# EAGLE board SparkFun_Music_Instrument_Shield_Panel_v13 (EAGLE 7.4.0), part 1 of 2
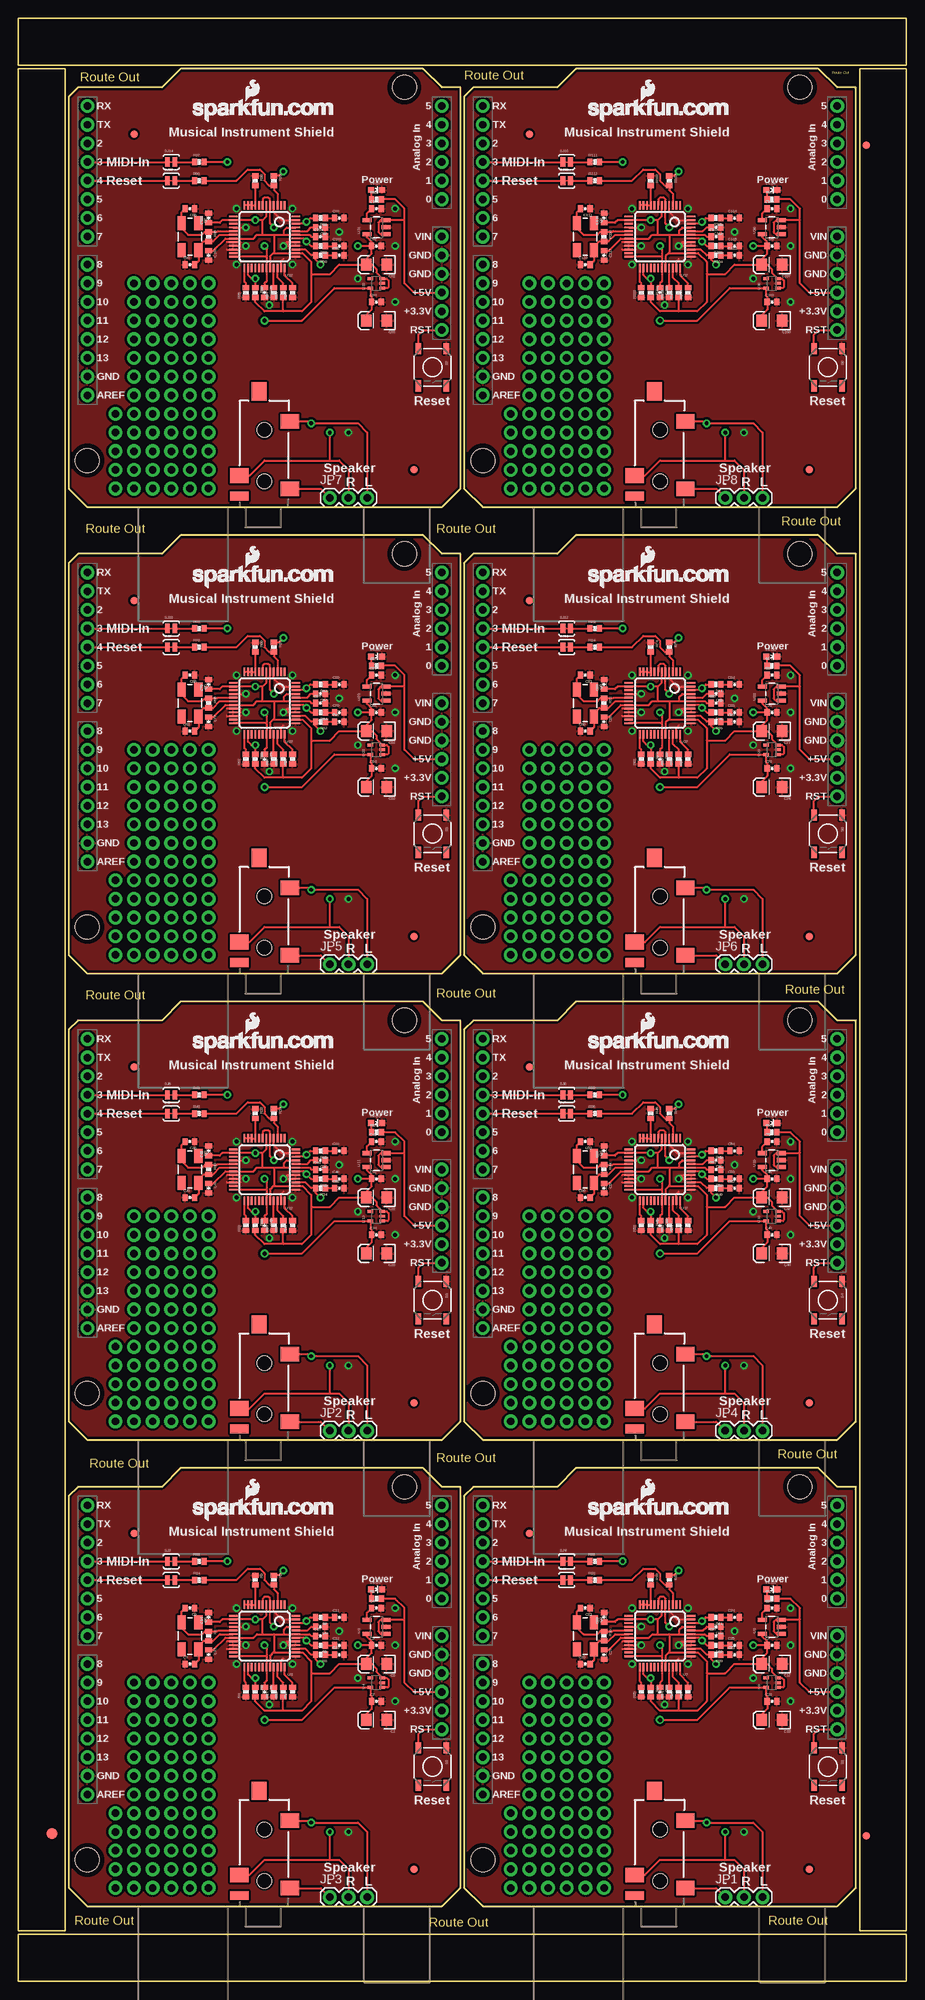
[diagram p0: board, top side]
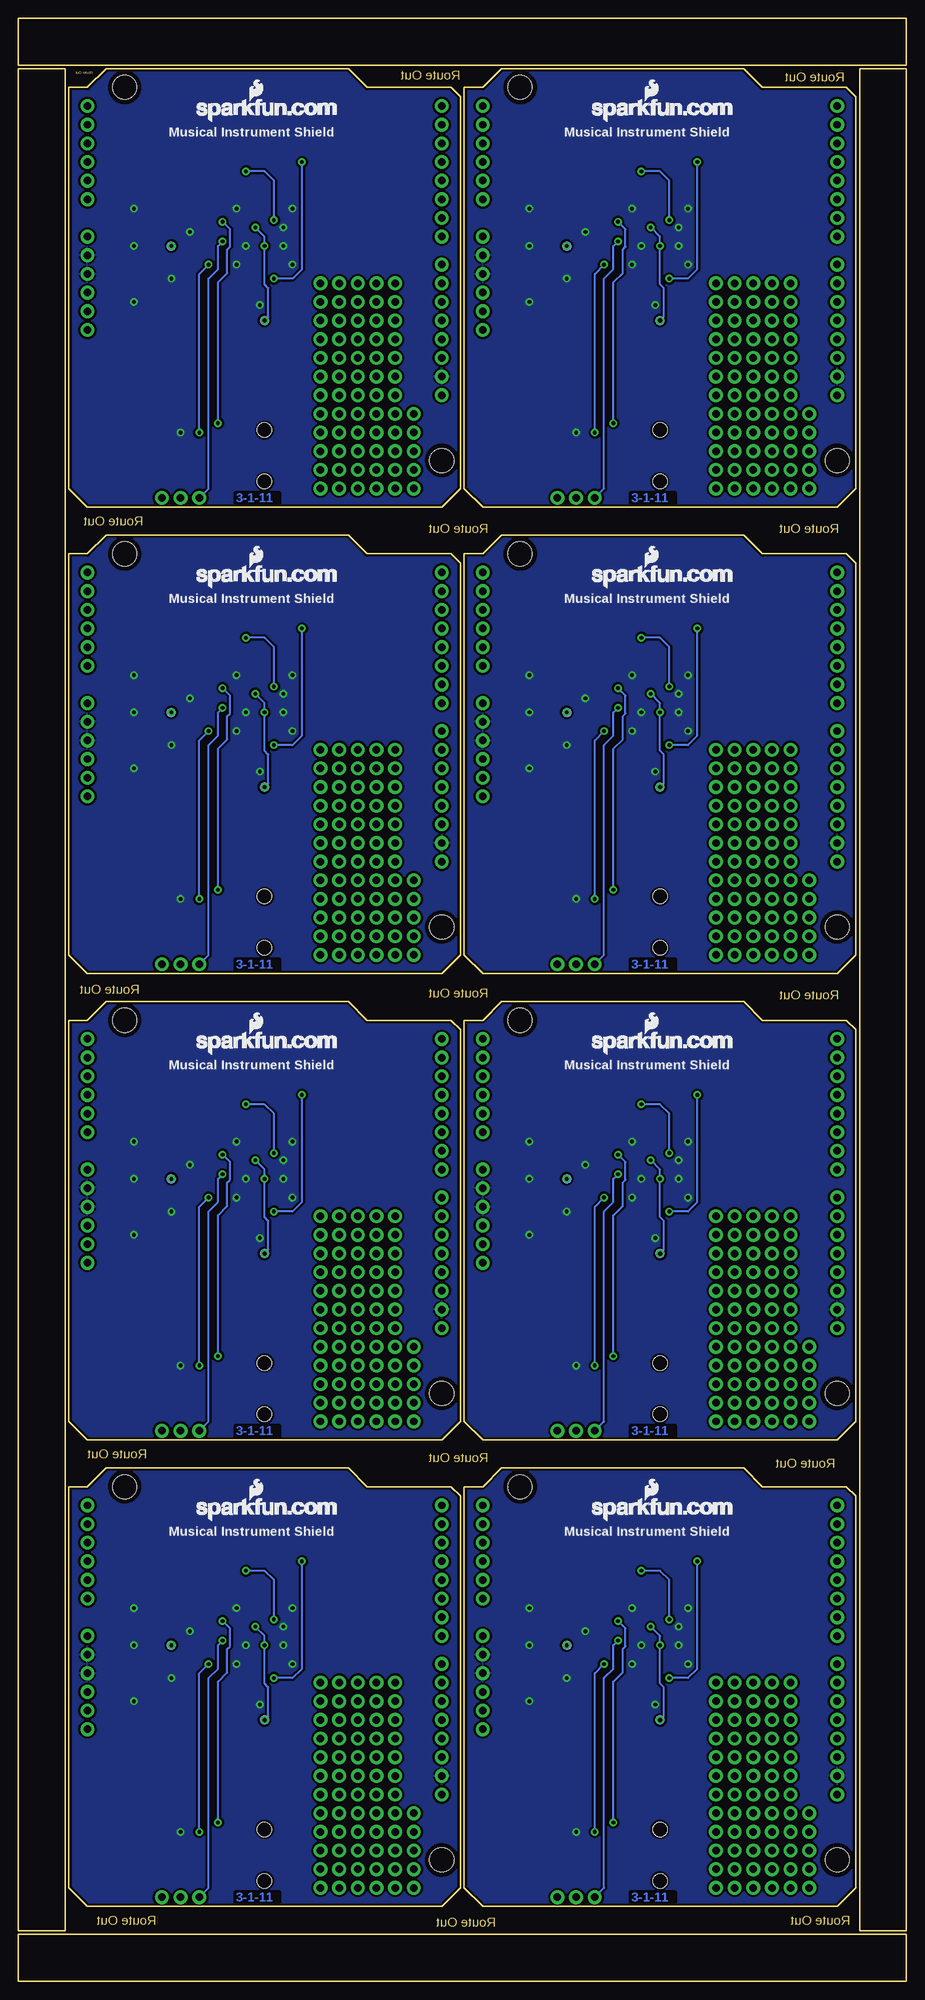
[diagram p1: board, bottom side, seen from below]

Size 120.9 x 267.21 mm. Coordinates in mm from the lower left corner, seen from the top.
Outline: 6.35,82.55 6.35,6.86 0,6.86 0,33.02
Outline: 0,30.48 0,260.35 6.35,260.35 6.35,80.01
Outline: 79.25,0 0,0 0,6.35 29.72,6.35
Outline: 27.18,6.35 120.9,6.35 120.9,0 76.71,0
Outline: 120.9,82.55 120.9,6.86 114.55,6.86 114.55,33.02
Outline: 114.55,30.48 114.55,260.35 120.9,260.35 120.9,80.01
Outline: 41.66,267.21 120.9,267.21 120.9,260.86 91.19,260.86
Outline: 93.73,260.86 0,260.86 0,267.21 44.2,267.21
Outline: 6.86,66.04 8.13,67.31 19.56,67.31 22.1,69.85 55.12,69.85 57.66,67.31 60.2,67.31 60.2,12.7 57.66,10.16 9.4,10.16 6.86,12.7 6.86,66.04
Outline: 60.71,66.04 61.98,67.31 73.41,67.31 75.95,69.85 108.97,69.85 111.51,67.31 114.05,67.31 114.05,12.7 111.51,10.16 63.25,10.16 60.71,12.7 60.71,66.04
Outline: 6.86,129.54 8.13,130.81 19.56,130.81 22.1,133.35 55.12,133.35 57.66,130.81 60.2,130.81 60.2,76.2 57.66,73.66 9.4,73.66 6.86,76.2 6.86,129.54
Outline: 60.71,129.54 61.98,130.81 73.41,130.81 75.95,133.35 108.97,133.35 111.51,130.81 114.05,130.81 114.05,76.2 111.51,73.66 63.25,73.66 60.71,76.2 60.71,129.54
Outline: 6.86,193.04 8.13,194.31 19.56,194.31 22.1,196.85 55.12,196.85 57.66,194.31 60.2,194.31 60.2,139.7 57.66,137.16 9.4,137.16 6.86,139.7 6.86,193.04
Outline: 60.71,193.04 61.98,194.31 73.41,194.31 75.95,196.85 108.97,196.85 111.51,194.31 114.05,194.31 114.05,139.7 111.51,137.16 63.25,137.16 60.71,139.7 60.71,193.04
Outline: 6.86,256.54 8.13,257.81 19.56,257.81 22.1,260.35 55.12,260.35 57.66,257.81 60.2,257.81 60.2,203.2 57.66,200.66 9.4,200.66 6.86,203.2 6.86,256.54
Outline: 60.71,256.54 61.98,257.81 73.41,257.81 75.95,260.35 108.97,260.35 111.51,257.81 114.05,257.81 114.05,203.2 111.51,200.66 63.25,200.66 60.71,203.2 60.71,256.54
Copper layers (1*16): Top 0.035mm / dielectric 1.5mm / Bottom 0.035mm
Design rules "SparkFun *": minimum track width 8mil, minimum drill 20mil, track to track 8mil, track to pad 8mil, pad to pad 8mil, via to via 8mil, smd to smd 8mil, copper to edge 9mil, drill to drill 7mil, minimum pad ring 12mil, minimum via ring 10mil, stop-mask expansion 4mil, vias tented up to drill 20mil, thermal gap 10mil

## Footprints (pad centres in the part's own frame; a part is rotated, then mirrored left to right if it is on the bottom)
EIA3216 = smd 1.4 x 1.6: A 1.4,0; C -1.4,0
0402-CAP = smd 0.7 x 0.9: 1 -0.65,0; 2 0.65,0
FIDUCIAL-1.5X3 = smd 1.5 x 1.5: 1 0,0
FIDUCIAL-1X2 = smd 1 x 1: 1 0,0
1X03 = drill 1.016 pad 1.88: 1 0,0; 2 2.54,0; 3 5.08,0
LED-0603 = smd 0.8 x 0.8: A 0,-0.75; C 0,0.75
CRYSTAL-SMD-5X3 = smd 1.9 x 1.1: 1 -1.85,-1.15; 2 1.85,-1.15; 3 1.85,1.15; 4 -1.85,1.15
0402-RES = smd 0.7 x 0.9: 1 -0.65,0; 2 0.65,0
TACTILE_SWITCH_SMD = smd 1.524 x 0.762: 1 -2.54,1.905; 2 2.54,1.905; 3 -2.54,-1.905; 4 2.54,-1.905
SJ_2S-TRACE = smd 0.635 x 1.27: 1 -0.508,0; 2 0.508,0
PAD.03X.05 = smd 1.27 x 1.27: P$1 0,0
SOT23-5 = smd 0.55 x 1.2: 1 -0.95,-1.3; 2 0,-1.3; 3 0.95,-1.3; 4 0.95,1.3; 5 -0.95,1.3
DUEMILANOVE_SHIELD = drill 1.016 pad 1.88: 3.3V 50.8,26.67; 5V 50.8,29.21; A0 50.8,41.91; A1 50.8,44.45; A2 50.8,46.99; A3 50.8,49.53; A4 50.8,52.07; A5 50.8,54.61; AREF 2.54,15.24; D2 2.54,49.53; D3 2.54,46.99; D4 2.54,44.45; D5 2.54,41.91; D6 2.54,39.37; D7 2.54,36.83; D8 2.54,33.02; D9 2.54,30.48; D10 2.54,27.94; D11 2.54,25.4; D12 2.54,22.86; D13 2.54,20.32; GND@0 50.8,31.75; GND@1 50.8,34.29; GND@2 2.54,17.78; RES 50.8,24.13; RX 2.54,54.61; TX 2.54,52.07; VIN 50.8,36.83 | hole 3.302: 45.72,57.15; 2.54,6.35
LQFP-48 = smd 0.254 x 1.143: 1 -2.75,-4.25; 2 -2.25,-4.25; 3 -1.75,-4.25; 4 -1.25,-4.25; 5 -0.75,-4.25; 6 -0.25,-4.25; 7 0.25,-4.25; 8 0.75,-4.25; 9 1.25,-4.25; 10 1.75,-4.25; 11 2.25,-4.25; 12 2.75,-4.25; 25 2.75,4.25; 26 2.25,4.25; 27 1.75,4.25; 28 1.25,4.25; 29 0.75,4.25; 30 0.25,4.25; 31 -0.25,4.25; 32 -0.75,4.25; 33 -1.25,4.25; 34 -1.75,4.25; 35 -2.25,4.25; 36 -2.75,4.25 | smd 1.143 x 0.254: 13 4.25,-2.75; 14 4.25,-2.25; 15 4.25,-1.75; 16 4.25,-1.25; 17 4.25,-0.75; 18 4.25,-0.25; 19 4.25,0.25; 20 4.25,0.75; 21 4.25,1.25; 22 4.25,1.75; 23 4.25,2.25; 24 4.25,2.75; 37 -4.25,2.75; 38 -4.25,2.25; 39 -4.25,1.75; 40 -4.25,1.25; 41 -4.25,0.75; 42 -4.25,0.25; 43 -4.25,-0.25; 44 -4.25,-0.75; 45 -4.25,-1.25; 46 -4.25,-1.75; 47 -4.25,-2.25; 48 -4.25,-2.75
SC70 = smd 0.4 x 0.75: 1 -0.65,-0.825; 2 0,-0.825; 3 0.65,-0.825; 4 0.65,0.825; 5 -0.65,0.825
AUDIO-JACK-3.5MM-SMD = smd 2 x 2.5: RING 4.3,3.45; SLEEVE 2.5,-3.45; TIP 11.7,-3.45 | smd 1.2 x 2.5: RSH 1.5,3.45 | smd 2.5 x 2: TSH 15.75,0.75 | hole 2: 3.5,0; 10.5,0

## Placement (x,y rotation side)
C1  10uF  [EIA3216]  48.77,35.56 180 top
C2  0.1uF  [0402-CAP]  48.77,38.1 0 top
C3  22pF  [0402-CAP]  23.37,43.18 0 top
C4  470pF  [0402-CAP]  48.77,50.8 0 top
C5  0.1uF  [0402-CAP]  48.77,45.72 0 top
C6  10uF  [EIA3216]  48.77,43.18 180 top
C7  0.1uF  [0402-CAP]  102.62,45.72 0 top
C8  22pF  [0402-CAP]  23.37,50.8 180 top
C9  1.0uF  [0402-CAP]  41.15,48.26 180 top
C10  10nF  [0402-CAP]  43.69,44.45 0 top
C11  10nF  [0402-CAP]  43.69,49.53 0 top
C12  47nF  [0402-CAP]  43.69,45.72 0 top
C13  0.1uF  [0402-CAP]  25.91,44.45 270 top
C14  0.1uF  [0402-CAP]  25.91,49.53 90 top
C15  0.1uF  [0402-CAP]  41.15,46.99 0 top
C16  0.1uF  [0402-CAP]  33.53,39.37 270 top
C17  10uF  [EIA3216]  102.62,43.18 180 top
C18  10uF  [EIA3216]  102.62,35.56 180 top
C19  0.1uF  [0402-CAP]  102.62,38.1 0 top
C20  22pF  [0402-CAP]  77.22,43.18 0 top
C21  22pF  [0402-CAP]  77.22,50.8 180 top
C22  1.0uF  [0402-CAP]  95,48.26 180 top
C23  10nF  [0402-CAP]  97.54,44.45 0 top
C24  10nF  [0402-CAP]  97.54,49.53 0 top
C25  47nF  [0402-CAP]  97.54,45.72 0 top
C26  470pF  [0402-CAP]  102.62,50.8 0 top
C27  0.1uF  [0402-CAP]  79.76,44.45 270 top
C28  0.1uF  [0402-CAP]  79.76,49.53 90 top
C29  0.1uF  [0402-CAP]  95,46.99 0 top
C30  0.1uF  [0402-CAP]  87.38,39.37 270 top
C31  0.1uF  [0402-CAP]  48.77,109.22 0 top
C32  10uF  [EIA3216]  48.77,106.68 180 top
C33  10uF  [EIA3216]  48.77,99.06 180 top
C34  0.1uF  [0402-CAP]  48.77,101.6 0 top
C35  22pF  [0402-CAP]  23.37,106.68 0 top
C36  22pF  [0402-CAP]  23.37,114.3 180 top
C37  1.0uF  [0402-CAP]  41.15,111.76 180 top
C38  10nF  [0402-CAP]  43.69,107.95 0 top
C39  10nF  [0402-CAP]  43.69,113.03 0 top
C40  47nF  [0402-CAP]  43.69,109.22 0 top
C41  470pF  [0402-CAP]  48.77,114.3 0 top
C42  0.1uF  [0402-CAP]  25.91,107.95 270 top
C43  0.1uF  [0402-CAP]  25.91,113.03 90 top
C44  0.1uF  [0402-CAP]  41.15,110.49 0 top
C45  0.1uF  [0402-CAP]  33.53,102.87 270 top
C46  0.1uF  [0402-CAP]  102.62,109.22 0 top
C47  10uF  [EIA3216]  102.62,106.68 180 top
C48  10uF  [EIA3216]  102.62,99.06 180 top
C49  0.1uF  [0402-CAP]  102.62,101.6 0 top
C50  22pF  [0402-CAP]  77.22,106.68 0 top
C51  22pF  [0402-CAP]  77.22,114.3 180 top
C52  1.0uF  [0402-CAP]  95,111.76 180 top
C53  10nF  [0402-CAP]  97.54,107.95 0 top
C54  10nF  [0402-CAP]  97.54,113.03 0 top
C55  47nF  [0402-CAP]  97.54,109.22 0 top
C56  470pF  [0402-CAP]  102.62,114.3 0 top
C57  0.1uF  [0402-CAP]  79.76,107.95 270 top
C58  0.1uF  [0402-CAP]  79.76,113.03 90 top
C59  0.1uF  [0402-CAP]  95,110.49 0 top
C60  0.1uF  [0402-CAP]  87.38,102.87 270 top
C61  0.1uF  [0402-CAP]  48.77,172.72 0 top
C62  10uF  [EIA3216]  48.77,170.18 180 top
C63  10uF  [EIA3216]  48.77,162.56 180 top
C64  0.1uF  [0402-CAP]  48.77,165.1 0 top
C65  22pF  [0402-CAP]  23.37,170.18 0 top
C66  22pF  [0402-CAP]  23.37,177.8 180 top
C67  1.0uF  [0402-CAP]  41.15,175.26 180 top
C68  10nF  [0402-CAP]  43.69,171.45 0 top
C69  10nF  [0402-CAP]  43.69,176.53 0 top
C70  47nF  [0402-CAP]  43.69,172.72 0 top
C71  470pF  [0402-CAP]  48.77,177.8 0 top
C72  0.1uF  [0402-CAP]  25.91,171.45 270 top
C73  0.1uF  [0402-CAP]  25.91,176.53 90 top
C74  0.1uF  [0402-CAP]  41.15,173.99 0 top
C75  0.1uF  [0402-CAP]  33.53,166.37 270 top
C76  0.1uF  [0402-CAP]  102.62,172.72 0 top
C77  10uF  [EIA3216]  102.62,170.18 180 top
C78  10uF  [EIA3216]  102.62,162.56 180 top
C79  0.1uF  [0402-CAP]  102.62,165.1 0 top
C80  22pF  [0402-CAP]  77.22,170.18 0 top
C81  22pF  [0402-CAP]  77.22,177.8 180 top
C82  1.0uF  [0402-CAP]  95,175.26 180 top
C83  10nF  [0402-CAP]  97.54,171.45 0 top
C84  10nF  [0402-CAP]  97.54,176.53 0 top
C85  47nF  [0402-CAP]  97.54,172.72 0 top
C86  470pF  [0402-CAP]  102.62,177.8 0 top
C87  0.1uF  [0402-CAP]  79.76,171.45 270 top
C88  0.1uF  [0402-CAP]  79.76,176.53 90 top
C89  0.1uF  [0402-CAP]  95,173.99 0 top
C90  0.1uF  [0402-CAP]  87.38,166.37 270 top
C91  0.1uF  [0402-CAP]  48.77,236.22 0 top
C92  10uF  [EIA3216]  48.77,233.68 180 top
C93  10uF  [EIA3216]  48.77,226.06 180 top
C94  0.1uF  [0402-CAP]  48.77,228.6 0 top
C95  22pF  [0402-CAP]  23.37,233.68 0 top
C96  22pF  [0402-CAP]  23.37,241.3 180 top
C97  1.0uF  [0402-CAP]  41.15,238.76 180 top
C98  10nF  [0402-CAP]  43.69,234.95 0 top
C99  10nF  [0402-CAP]  43.69,240.03 0 top
C100  47nF  [0402-CAP]  43.69,236.22 0 top
C101  470pF  [0402-CAP]  48.77,241.3 0 top
C102  0.1uF  [0402-CAP]  25.91,234.95 270 top
C103  0.1uF  [0402-CAP]  25.91,240.03 90 top
C104  0.1uF  [0402-CAP]  41.15,237.49 0 top
C105  0.1uF  [0402-CAP]  33.53,229.87 270 top
C106  0.1uF  [0402-CAP]  102.62,236.22 0 top
C107  10uF  [EIA3216]  102.62,233.68 180 top
C108  10uF  [EIA3216]  102.62,226.06 180 top
C109  0.1uF  [0402-CAP]  102.62,228.6 0 top
C110  22pF  [0402-CAP]  77.22,233.68 0 top
C111  22pF  [0402-CAP]  77.22,241.3 180 top
C112  1.0uF  [0402-CAP]  95,238.76 180 top
C113  10nF  [0402-CAP]  97.54,234.95 0 top
C114  10nF  [0402-CAP]  97.54,240.03 0 top
C115  47nF  [0402-CAP]  97.54,236.22 0 top
C116  470pF  [0402-CAP]  102.62,241.3 0 top
C117  0.1uF  [0402-CAP]  79.76,234.95 270 top
C118  0.1uF  [0402-CAP]  79.76,240.03 90 top
C119  0.1uF  [0402-CAP]  95,237.49 0 top
C120  0.1uF  [0402-CAP]  87.38,229.87 270 top
E$1  [FIDUCIAL-1.5X3]  4.57,20.07 0 top
E$5  [FIDUCIAL-1X2]  115.44,19.81 0 top
E$6  [FIDUCIAL-1X2]  115.44,249.94 180 top
JP1  External Speaker  [1X03]  96.27,11.43 0 top
JP2  External Speaker  [1X03]  42.42,74.93 0 top
JP3  External Speaker  [1X03]  42.42,11.43 0 top
JP4  External Speaker  [1X03]  96.27,74.93 0 top
JP5  External Speaker  [1X03]  42.42,138.43 0 top
JP6  External Speaker  [1X03]  96.27,138.43 0 top
JP7  External Speaker  [1X03]  42.42,201.93 0 top
JP8  External Speaker  [1X03]  96.27,201.93 0 top
LED1  Power  [LED-0603]  48.77,53.34 270 top
LED2  Power  [LED-0603]  102.62,53.34 270 top
LED3  Power  [LED-0603]  48.77,116.84 270 top
LED4  Power  [LED-0603]  102.62,116.84 270 top
LED5  Power  [LED-0603]  48.77,180.34 270 top
LED6  Power  [LED-0603]  102.62,180.34 270 top
LED7  Power  [LED-0603]  48.77,243.84 270 top
LED8  Power  [LED-0603]  102.62,243.84 270 top
Q1  12.288MHz  [CRYSTAL-SMD-5X3]  23.37,46.99 270 top
Q2  12.288MHz  [CRYSTAL-SMD-5X3]  77.22,46.99 270 top
Q3  12.288MHz  [CRYSTAL-SMD-5X3]  23.37,110.49 270 top
Q4  12.288MHz  [CRYSTAL-SMD-5X3]  77.22,110.49 270 top
Q5  12.288MHz  [CRYSTAL-SMD-5X3]  23.37,173.99 270 top
Q6  12.288MHz  [CRYSTAL-SMD-5X3]  77.22,173.99 270 top
Q7  12.288MHz  [CRYSTAL-SMD-5X3]  23.37,237.49 270 top
Q8  12.288MHz  [CRYSTAL-SMD-5X3]  77.22,237.49 270 top
R1  1M  [0402-RES]  25.91,46.99 270 top
R2  100k  [0402-RES]  32.26,39.37 270 top
R3  100k  [0402-RES]  32.26,54.61 270 top
R4  100k  [0402-RES]  30.99,39.37 90 top
R5  100k  [0402-RES]  34.8,54.61 270 top
R6  20  [0402-RES]  41.15,44.45 180 top
R7  20  [0402-RES]  41.15,49.53 180 top
R8  330  [0402-RES]  48.77,52.07 0 top
R9  10  [0402-RES]  41.15,45.72 180 top
R10  100k  [0402-RES]  36.07,39.37 90 top
R11  100k  [0402-RES]  34.8,39.37 90 top
R12  100k  [0402-RES]  37.34,39.37 90 top
R13  1K  [0402-RES]  24.64,57.15 0 top
R14  1K  [0402-RES]  24.64,54.61 0 top
R15  330  [0402-RES]  102.62,52.07 0 top
R16  1M  [0402-RES]  79.76,46.99 270 top
R17  100k  [0402-RES]  86.11,39.37 270 top
R18  100k  [0402-RES]  86.11,54.61 270 top
R19  100k  [0402-RES]  88.65,54.61 270 top
R20  20  [0402-RES]  95,44.45 180 top
R21  20  [0402-RES]  95,49.53 180 top
R22  10  [0402-RES]  95,45.72 180 top
R23  100k  [0402-RES]  89.92,39.37 90 top
R24  100k  [0402-RES]  88.65,39.37 90 top
R25  100k  [0402-RES]  84.84,39.37 90 top
R26  100k  [0402-RES]  91.19,39.37 90 top
R27  1K  [0402-RES]  78.49,57.15 0 top
R28  1K  [0402-RES]  78.49,54.61 0 top
R29  330  [0402-RES]  48.77,115.57 0 top
R30  1M  [0402-RES]  25.91,110.49 270 top
R31  100k  [0402-RES]  32.26,102.87 270 top
R32  100k  [0402-RES]  32.26,118.11 270 top
R33  100k  [0402-RES]  34.8,118.11 270 top
R34  20  [0402-RES]  41.15,107.95 180 top
R35  20  [0402-RES]  41.15,113.03 180 top
R36  10  [0402-RES]  41.15,109.22 180 top
R37  100k  [0402-RES]  36.07,102.87 90 top
R38  100k  [0402-RES]  34.8,102.87 90 top
R39  100k  [0402-RES]  30.99,102.87 90 top
R40  100k  [0402-RES]  37.34,102.87 90 top
R41  1K  [0402-RES]  24.64,120.65 0 top
R42  1K  [0402-RES]  24.64,118.11 0 top
R43  330  [0402-RES]  102.62,115.57 0 top
R44  1M  [0402-RES]  79.76,110.49 270 top
R45  100k  [0402-RES]  86.11,102.87 270 top
R46  100k  [0402-RES]  86.11,118.11 270 top
R47  100k  [0402-RES]  88.65,118.11 270 top
R48  20  [0402-RES]  95,107.95 180 top
R49  20  [0402-RES]  95,113.03 180 top
R50  10  [0402-RES]  95,109.22 180 top
R51  100k  [0402-RES]  89.92,102.87 90 top
R52  100k  [0402-RES]  88.65,102.87 90 top
R53  100k  [0402-RES]  84.84,102.87 90 top
R54  100k  [0402-RES]  91.19,102.87 90 top
R55  1K  [0402-RES]  78.49,120.65 0 top
R56  1K  [0402-RES]  78.49,118.11 0 top
R57  330  [0402-RES]  48.77,179.07 0 top
R58  1M  [0402-RES]  25.91,173.99 270 top
R59  100k  [0402-RES]  32.26,166.37 270 top
R60  100k  [0402-RES]  32.26,181.61 270 top
R61  100k  [0402-RES]  34.8,181.61 270 top
R62  20  [0402-RES]  41.15,171.45 180 top
R63  20  [0402-RES]  41.15,176.53 180 top
R64  10  [0402-RES]  41.15,172.72 180 top
R65  100k  [0402-RES]  36.07,166.37 90 top
R66  100k  [0402-RES]  34.8,166.37 90 top
R67  100k  [0402-RES]  30.99,166.37 90 top
R68  100k  [0402-RES]  37.34,166.37 90 top
R69  1K  [0402-RES]  24.64,184.15 0 top
R70  1K  [0402-RES]  24.64,181.61 0 top
R71  330  [0402-RES]  102.62,179.07 0 top
R72  1M  [0402-RES]  79.76,173.99 270 top
R73  100k  [0402-RES]  86.11,166.37 270 top
R74  100k  [0402-RES]  86.11,181.61 270 top
R75  100k  [0402-RES]  88.65,181.61 270 top
R76  20  [0402-RES]  95,171.45 180 top
R77  20  [0402-RES]  95,176.53 180 top
R78  10  [0402-RES]  95,172.72 180 top
R79  100k  [0402-RES]  89.92,166.37 90 top
R80  100k  [0402-RES]  88.65,166.37 90 top
R81  100k  [0402-RES]  84.84,166.37 90 top
R82  100k  [0402-RES]  91.19,166.37 90 top
R83  1K  [0402-RES]  78.49,184.15 0 top
R84  1K  [0402-RES]  78.49,181.61 0 top
R85  330  [0402-RES]  48.77,242.57 0 top
R86  1M  [0402-RES]  25.91,237.49 270 top
R87  100k  [0402-RES]  32.26,229.87 270 top
R88  100k  [0402-RES]  32.26,245.11 270 top
R89  100k  [0402-RES]  34.8,245.11 270 top
R90  20  [0402-RES]  41.15,234.95 180 top
R91  20  [0402-RES]  41.15,240.03 180 top
R92  10  [0402-RES]  41.15,236.22 180 top
R93  100k  [0402-RES]  36.07,229.87 90 top
R94  100k  [0402-RES]  34.8,229.87 90 top
R95  100k  [0402-RES]  30.99,229.87 90 top
R96  100k  [0402-RES]  37.34,229.87 90 top
R97  1K  [0402-RES]  24.64,247.65 0 top
R98  1K  [0402-RES]  24.64,245.11 0 top
R99  330  [0402-RES]  102.62,242.57 0 top
R100  1M  [0402-RES]  79.76,237.49 270 top
R101  100k  [0402-RES]  86.11,229.87 270 top
R102  100k  [0402-RES]  86.11,245.11 270 top
R103  100k  [0402-RES]  88.65,245.11 270 top
R104  20  [0402-RES]  95,234.95 180 top
R105  20  [0402-RES]  95,240.03 180 top
R106  10  [0402-RES]  95,236.22 180 top
R107  100k  [0402-RES]  89.92,229.87 90 top
R108  100k  [0402-RES]  88.65,229.87 90 top
R109  100k  [0402-RES]  84.84,229.87 90 top
R110  100k  [0402-RES]  91.19,229.87 90 top
R111  1K  [0402-RES]  78.49,247.65 0 top
R112  1K  [0402-RES]  78.49,245.11 0 top
S1  Reset  [TACTILE_SWITCH_SMD]  110.24,29.21 270 top
S2  Reset  [TACTILE_SWITCH_SMD]  56.39,29.21 270 top
S3  Reset  [TACTILE_SWITCH_SMD]  56.39,92.71 270 top
S4  Reset  [TACTILE_SWITCH_SMD]  110.24,92.71 270 top
S5  Reset  [TACTILE_SWITCH_SMD]  56.39,156.21 270 top
S6  Reset  [TACTILE_SWITCH_SMD]  110.24,156.21 270 top
S7  Reset  [TACTILE_SWITCH_SMD]  56.39,219.71 270 top
S8  Reset  [TACTILE_SWITCH_SMD]  110.24,219.71 270 top
SJ1  NC  [SJ_2S-TRACE]  20.83,54.61 0 top
SJ2  NC  [SJ_2S-TRACE]  20.83,57.15 0 top
SJ3  NC  [SJ_2S-TRACE]  74.68,54.61 0 top
SJ4  NC  [SJ_2S-TRACE]  74.68,57.15 0 top
SJ5  NC  [SJ_2S-TRACE]  20.83,118.11 0 top
SJ6  NC  [SJ_2S-TRACE]  20.83,120.65 0 top
SJ7  NC  [SJ_2S-TRACE]  74.68,118.11 0 top
SJ8  NC  [SJ_2S-TRACE]  74.68,120.65 0 top
SJ9  NC  [SJ_2S-TRACE]  20.83,181.61 0 top
SJ10  NC  [SJ_2S-TRACE]  20.83,184.15 0 top
SJ11  NC  [SJ_2S-TRACE]  74.68,181.61 0 top
SJ12  NC  [SJ_2S-TRACE]  74.68,184.15 0 top
SJ13  NC  [SJ_2S-TRACE]  20.83,245.11 0 top
SJ14  NC  [SJ_2S-TRACE]  20.83,247.65 0 top
SJ15  NC  [SJ_2S-TRACE]  74.68,245.11 0 top
SJ16  NC  [SJ_2S-TRACE]  74.68,247.65 0 top
TP1  [PAD.03X.05]  46.23,45.72 0 bottom
TP2  [PAD.03X.05]  33.53,35.56 0 bottom
TP3  [PAD.03X.05]  100.08,45.72 0 bottom
TP4  [PAD.03X.05]  87.38,35.56 0 bottom
TP5  [PAD.03X.05]  46.23,109.22 0 bottom
TP6  [PAD.03X.05]  33.53,99.06 0 bottom
TP7  [PAD.03X.05]  100.08,109.22 0 bottom
TP8  [PAD.03X.05]  87.38,99.06 0 bottom
TP9  [PAD.03X.05]  46.23,172.72 0 bottom
TP10  [PAD.03X.05]  33.53,162.56 0 bottom
TP11  [PAD.03X.05]  100.08,172.72 0 bottom
TP12  [PAD.03X.05]  87.38,162.56 0 bottom
TP13  [PAD.03X.05]  46.23,236.22 0 bottom
TP14  [PAD.03X.05]  33.53,226.06 0 bottom
TP15  [PAD.03X.05]  100.08,236.22 0 bottom
TP16  [PAD.03X.05]  87.38,226.06 0 bottom
U1  3.3V  [SOT23-5]  48.77,48.26 90 top
U2  ARDUINO_SHIELD  [DUEMILANOVE_SHIELD]  6.86,10.16 0 top
U3  VS1053  [LQFP-48]  33.53,46.99 180 top
U4  1.8V  [SC70]  48.77,40.64 90 top
U5  [AUDIO-JACK-3.5MM-SMD]  33.53,10.16 90 top
U6  3.3V  [SOT23-5]  102.62,48.26 90 top
U7  VS1053  [LQFP-48]  87.38,46.99 180 top
U8  1.8V  [SC70]  102.62,40.64 90 top
U9  ARDUINO_SHIELD  [DUEMILANOVE_SHIELD]  60.71,10.16 0 top
U10  [AUDIO-JACK-3.5MM-SMD]  87.38,10.16 90 top
U11  3.3V  [SOT23-5]  48.77,111.76 90 top
U12  VS1053  [LQFP-48]  33.53,110.49 180 top
U13  1.8V  [SC70]  48.77,104.14 90 top
U14  ARDUINO_SHIELD  [DUEMILANOVE_SHIELD]  6.86,73.66 0 top
U15  [AUDIO-JACK-3.5MM-SMD]  33.53,73.66 90 top
U16  3.3V  [SOT23-5]  102.62,111.76 90 top
U17  VS1053  [LQFP-48]  87.38,110.49 180 top
U18  1.8V  [SC70]  102.62,104.14 90 top
U19  ARDUINO_SHIELD  [DUEMILANOVE_SHIELD]  60.71,73.66 0 top
U20  [AUDIO-JACK-3.5MM-SMD]  87.38,73.66 90 top
U21  3.3V  [SOT23-5]  48.77,175.26 90 top
U22  VS1053  [LQFP-48]  33.53,173.99 180 top
U23  1.8V  [SC70]  48.77,167.64 90 top
U24  ARDUINO_SHIELD  [DUEMILANOVE_SHIELD]  6.86,137.16 0 top
U25  [AUDIO-JACK-3.5MM-SMD]  33.53,137.16 90 top
U26  3.3V  [SOT23-5]  102.62,175.26 90 top
U27  VS1053  [LQFP-48]  87.38,173.99 180 top
U28  1.8V  [SC70]  102.62,167.64 90 top
U29  ARDUINO_SHIELD  [DUEMILANOVE_SHIELD]  60.71,137.16 0 top
U30  [AUDIO-JACK-3.5MM-SMD]  87.38,137.16 90 top
U31  3.3V  [SOT23-5]  48.77,238.76 90 top
U32  VS1053  [LQFP-48]  33.53,237.49 180 top
U33  1.8V  [SC70]  48.77,231.14 90 top
U34  ARDUINO_SHIELD  [DUEMILANOVE_SHIELD]  6.86,200.66 0 top
U35  [AUDIO-JACK-3.5MM-SMD]  33.53,200.66 90 top
U36  3.3V  [SOT23-5]  102.62,238.76 90 top
U37  VS1053  [LQFP-48]  87.38,237.49 180 top
U38  1.8V  [SC70]  102.62,231.14 90 top
U39  ARDUINO_SHIELD  [DUEMILANOVE_SHIELD]  60.71,200.66 0 top
U40  [AUDIO-JACK-3.5MM-SMD]  87.38,200.66 90 top
U$1  LOGO-SFENEW  [SFE-NEW-WEBLOGO]  77.6,62.61 0 top
U$2  FIDUCIAL1X2  [FIDUCIAL-1X2]  107.7,15.24 0 top
U$3  FIDUCIAL1X2  [FIDUCIAL-1X2]  69.6,60.96 0 top
U$4  FIDUCIAL1X2  [FIDUCIAL-1X2]  53.85,15.24 0 top
U$5  FIDUCIAL1X2  [FIDUCIAL-1X2]  15.75,60.96 0 top
U$6  LOGO-SFENEW  [SFE-NEW-WEBLOGO]  96.65,62.61 0 bottom
U$7  LOGO-SFENEW  [SFE-NEW-WEBLOGO]  23.75,62.61 0 top
U$8  LOGO-SFENEW  [SFE-NEW-WEBLOGO]  42.8,62.61 0 bottom
U$9  LOGO-SFENEW  [SFE-NEW-WEBLOGO]  23.75,126.11 0 top
U$10  FIDUCIAL1X2  [FIDUCIAL-1X2]  53.85,78.74 0 top
U$11  FIDUCIAL1X2  [FIDUCIAL-1X2]  15.75,124.46 0 top
U$12  LOGO-SFENEW  [SFE-NEW-WEBLOGO]  42.8,126.11 0 bottom
U$13  LOGO-SFENEW  [SFE-NEW-WEBLOGO]  77.6,126.11 0 top
U$14  FIDUCIAL1X2  [FIDUCIAL-1X2]  107.7,78.74 0 top
U$15  FIDUCIAL1X2  [FIDUCIAL-1X2]  69.6,124.46 0 top
U$16  LOGO-SFENEW  [SFE-NEW-WEBLOGO]  96.65,126.11 0 bottom
U$17  LOGO-SFENEW  [SFE-NEW-WEBLOGO]  23.75,189.61 0 top
U$18  FIDUCIAL1X2  [FIDUCIAL-1X2]  53.85,142.24 0 top
U$19  FIDUCIAL1X2  [FIDUCIAL-1X2]  15.75,187.96 0 top
U$20  LOGO-SFENEW  [SFE-NEW-WEBLOGO]  42.8,189.61 0 bottom
U$21  LOGO-SFENEW  [SFE-NEW-WEBLOGO]  77.6,189.61 0 top
U$22  FIDUCIAL1X2  [FIDUCIAL-1X2]  107.7,142.24 0 top
U$23  FIDUCIAL1X2  [FIDUCIAL-1X2]  69.6,187.96 0 top
U$24  LOGO-SFENEW  [SFE-NEW-WEBLOGO]  96.65,189.61 0 bottom
U$25  LOGO-SFENEW  [SFE-NEW-WEBLOGO]  23.75,253.11 0 top
U$26  FIDUCIAL1X2  [FIDUCIAL-1X2]  53.85,205.74 0 top
U$27  FIDUCIAL1X2  [FIDUCIAL-1X2]  15.75,251.46 0 top
U$28  LOGO-SFENEW  [SFE-NEW-WEBLOGO]  42.8,253.11 0 bottom
U$29  LOGO-SFENEW  [SFE-NEW-WEBLOGO]  77.6,253.11 0 top
U$30  FIDUCIAL1X2  [FIDUCIAL-1X2]  107.7,205.74 0 top
U$31  FIDUCIAL1X2  [FIDUCIAL-1X2]  69.6,251.46 0 top
U$32  LOGO-SFENEW  [SFE-NEW-WEBLOGO]  96.65,253.11 0 bottom

## Library data of the parts
C1-C120 JP1-JP8 LED1-LED8 Q1-Q8 R1-R112 S1-S8 SJ1-SJ16 TP1-TP16 U1-U40 U$1-U$32 = SparkFun
E$1 = SparkFun-Retired
E$5 E$6 = SparkFun-Aesthetics

## Nets
1.8V: C1.A C2.1 C16.1 TP2.P$1 U3.5 U3.7 U3.24 U3.31 U4.5
1.8V1: C18.A C19.1 C30.1 TP4.P$1 U7.5 U7.7 U7.24 U7.31 U8.5
1.8V2: C33.A C34.1 C45.1 TP6.P$1 U12.5 U12.7 U12.24 U12.31 U13.5
1.8V3: C48.A C49.1 C60.1 TP8.P$1 U17.5 U17.7 U17.24 U17.31 U18.5
1.8V4: C63.A C64.1 C75.1 TP10.P$1 U22.5 U22.7 U22.24 U22.31 U23.5
1.8V5: C78.A C79.1 C90.1 TP12.P$1 U27.5 U27.7 U27.24 U27.31 U28.5
1.8V6: C93.A C94.1 C105.1 TP14.P$1 U32.5 U32.7 U32.24 U32.31 U33.5
1.8V7: C108.A C109.1 C120.1 TP16.P$1 U37.5 U37.7 U37.24 U37.31 U38.5
3.3V: C5.1 C6.A C13.1 C14.1 C15.1 R2.2 R5.1 R10.1 TP1.P$1 U1.5 U3.6 U3.14 U3.19 U3.32 U3.38 U3.43 U3.45 U4.1 U4.3
3.3V1: C7.1 C17.A C27.1 C28.1 C29.1 R17.2 R19.1 R23.1 TP3.P$1 U6.5 U7.6 U7.14 U7.19 U7.32 U7.38 U7.43 U7.45 U8.1 U8.3
3.3V2: C31.1 C32.A C42.1 C43.1 C44.1 R31.2 R33.1 R37.1 TP5.P$1 U11.5 U12.6 U12.14 U12.19 U12.32 U12.38 U12.43 U12.45 U13.1 U13.3
3.3V3: C46.1 C47.A C57.1 C58.1 C59.1 R45.2 R47.1 R51.1 TP7.P$1 U16.5 U17.6 U17.14 U17.19 U17.32 U17.38 U17.43 U17.45 U18.1 U18.3
3.3V4: C61.1 C62.A C72.1 C73.1 C74.1 R59.2 R61.1 R65.1 TP9.P$1 U21.5 U22.6 U22.14 U22.19 U22.32 U22.38 U22.43 U22.45 U23.1 U23.3
3.3V5: C76.1 C77.A C87.1 C88.1 C89.1 R73.2 R75.1 R79.1 TP11.P$1 U26.5 U27.6 U27.14 U27.19 U27.32 U27.38 U27.43 U27.45 U28.1 U28.3
3.3V6: C91.1 C92.A C102.1 C103.1 C104.1 R87.2 R89.1 R93.1 TP13.P$1 U31.5 U32.6 U32.14 U32.19 U32.32 U32.38 U32.43 U32.45 U33.1 U33.3
3.3V7: C106.1 C107.A C117.1 C118.1 C119.1 R101.2 R103.1 R107.1 TP15.P$1 U36.5 U37.6 U37.14 U37.19 U37.32 U37.38 U37.43 U37.45 U38.1 U38.3
ARST: S2.3 U2.RES
ARST1: S1.3 U9.RES
ARST2: S3.3 U14.RES
ARST3: S4.3 U19.RES
ARST4: S5.3 U24.RES
ARST5: S6.3 U29.RES
ARST6: S7.3 U34.RES
ARST7: S8.3 U39.RES
G1: R3.2 U3.9 U3.10 U3.11 U3.12
G2: R4.2 U3.25
G3: R18.2 U7.9 U7.10 U7.11 U7.12
G4: R25.2 U7.25
G5: R32.2 U12.9 U12.10 U12.11 U12.12
G6: R39.2 U12.25
G7: R46.2 U17.9 U17.10 U17.11 U17.12
G8: R53.2 U17.25
G9: R60.2 U22.9 U22.10 U22.11 U22.12
G10: R67.2 U22.25
G11: R74.2 U27.9 U27.10 U27.11 U27.12
G12: R81.2 U27.25
G13: R88.2 U32.9 U32.10 U32.11 U32.12
G14: R95.2 U32.25
G15: R102.2 U37.9 U37.10 U37.11 U37.12
G16: R109.2 U37.25
GBUF: JP3.1 R9.2 U3.42 U5.SLEEVE
GBUF1: JP1.1 R22.2 U7.42 U10.SLEEVE
GBUF2: JP2.1 R36.2 U12.42 U15.SLEEVE
GBUF3: JP4.1 R50.2 U17.42 U20.SLEEVE
GBUF4: JP5.1 R64.2 U22.42 U25.SLEEVE
GBUF5: JP6.1 R78.2 U27.42 U30.SLEEVE
GBUF6: JP7.1 R92.2 U32.42 U35.SLEEVE
GBUF7: JP8.1 R106.2 U37.42 U40.SLEEVE
GND: C1.C C2.2 C3.1 C4.2 C5.2 C6.C C8.1 C9.1 C10.2 C11.2 C12.2 C13.2 C14.2 C15.2 C16.2 LED1.C R3.1 R4.1 R11.1 R12.1 S2.1 U1.2 U2.GND@0 U2.GND@1 U2.GND@2 U3.4 U3.16 U3.20 U3.21 U3.22 U3.35 U3.37 U3.40 U3.41 U3.47 U4.2
GND1: C7.2 C17.C C18.C C19.2 C20.1 C21.1 C22.1 C23.2 C24.2 C25.2 C26.2 C27.2 C28.2 C29.2 C30.2 LED2.C R18.1 R24.1 R25.1 R26.1 S1.1 U6.2 U7.4 U7.16 U7.20 U7.21 U7.22 U7.35 U7.37 U7.40 U7.41 U7.47 U8.2 U9.GND@0 U9.GND@1 U9.GND@2
GND2: C31.2 C32.C C33.C C34.2 C35.1 C36.1 C37.1 C38.2 C39.2 C40.2 C41.2 C42.2 C43.2 C44.2 C45.2 LED3.C R32.1 R38.1 R39.1 R40.1 S3.1 U11.2 U12.4 U12.16 U12.20 U12.21 U12.22 U12.35 U12.37 U12.40 U12.41 U12.47 U13.2 U14.GND@0 U14.GND@1 U14.GND@2
GND3: C46.2 C47.C C48.C C49.2 C50.1 C51.1 C52.1 C53.2 C54.2 C55.2 C56.2 C57.2 C58.2 C59.2 C60.2 LED4.C R46.1 R52.1 R53.1 R54.1 S4.1 U16.2 U17.4 U17.16 U17.20 U17.21 U17.22 U17.35 U17.37 U17.40 U17.41 U17.47 U18.2 U19.GND@0 U19.GND@1 U19.GND@2
GND4: C61.2 C62.C C63.C C64.2 C65.1 C66.1 C67.1 C68.2 C69.2 C70.2 C71.2 C72.2 C73.2 C74.2 C75.2 LED5.C R60.1 R66.1 R67.1 R68.1 S5.1 U21.2 U22.4 U22.16 U22.20 U22.21 U22.22 U22.35 U22.37 U22.40 U22.41 U22.47 U23.2 U24.GND@0 U24.GND@1 U24.GND@2
GND5: C76.2 C77.C C78.C C79.2 C80.1 C81.1 C82.1 C83.2 C84.2 C85.2 C86.2 C87.2 C88.2 C89.2 C90.2 LED6.C R74.1 R80.1 R81.1 R82.1 S6.1 U26.2 U27.4 U27.16 U27.20 U27.21 U27.22 U27.35 U27.37 U27.40 U27.41 U27.47 U28.2 U29.GND@0 U29.GND@1 U29.GND@2
GND6: C91.2 C92.C C93.C C94.2 C95.1 C96.1 C97.1 C98.2 C99.2 C100.2 C101.2 C102.2 C103.2 C104.2 C105.2 LED7.C R88.1 R94.1 R95.1 R96.1 S7.1 U31.2 U32.4 U32.16 U32.20 U32.21 U32.22 U32.35 U32.37 U32.40 U32.41 U32.47 U33.2 U34.GND@0 U34.GND@1 U34.GND@2
GND7: C106.2 C107.C C108.C C109.2 C110.1 C111.1 C112.1 C113.2 C114.2 C115.2 C116.2 C117.2 C118.2 C119.2 C120.2 LED8.C R102.1 R108.1 R109.1 R110.1 S8.1 U36.2 U37.4 U37.16 U37.20 U37.21 U37.22 U37.35 U37.37 U37.40 U37.41 U37.47 U38.2 U39.GND@0 U39.GND@1 U39.GND@2
GPIO0: R11.2 U3.33
GPIO1: R10.2 U3.34
GPIO2: R24.2 U7.33
GPIO3: R23.2 U7.34
GPIO4: R38.2 U12.33
GPIO5: R37.2 U12.34
GPIO6: R52.2 U17.33
GPIO7: R51.2 U17.34
GPIO8: R66.2 U22.33
GPIO9: R65.2 U22.34
GPIO10: R80.2 U27.33
GPIO11: R79.2 U27.34
GPIO12: R94.2 U32.33
GPIO13: R93.2 U32.34
GPIO14: R108.2 U37.33
GPIO15: R107.2 U37.34
LEFT: JP3.3 R7.2 U3.46 U5.TIP
LEFT1: JP1.3 R21.2 U7.46 U10.TIP
LEFT2: JP2.3 R35.2 U12.46 U15.TIP
LEFT3: JP4.3 R49.2 U17.46 U20.TIP
LEFT4: JP5.3 R63.2 U22.46 U25.TIP
LEFT5: JP6.3 R77.2 U27.46 U30.TIP
LEFT6: JP7.3 R91.2 U32.46 U35.TIP
LEFT7: JP8.3 R105.2 U37.46 U40.TIP
N$1: C9.2 U3.44
N$2: C12.1 R9.1
N$3: C10.1 R6.1
N$5: C11.1 R7.1
N$6: LED1.A R8.1
N$7: SJ1.1 U2.D4
N$8: R13.1 SJ2.2
N$9: C3.2 Q1.3 R1.2 U3.18
N$10: C8.2 Q1.1 R1.1 U3.17
N$11: R14.1 SJ1.2
N$12: LED2.A R15.1
N$13: SJ2.1 U2.D3
N$14: C20.2 Q2.3 R16.2 U7.18
N$15: C21.2 Q2.1 R16.1 U7.17
N$21: C22.2 U7.44
N$22: C25.1 R22.1
N$23: C24.1 R21.1
N$24: C23.1 R20.1
N$70: C4.1 U1.4
N$73: R12.2 U3.36
N$136: C26.1 U6.4
N$137: R26.2 U7.36
N$153: SJ3.1 U9.D4
N$154: R28.1 SJ3.2
N$155: SJ4.1 U9.D3
N$156: R27.1 SJ4.2
N$157: LED3.A R29.1
N$158: C35.2 Q3.3 R30.2 U12.18
N$159: C36.2 Q3.1 R30.1 U12.17
N$160: C37.2 U12.44
N$161: C40.1 R36.1
N$162: C39.1 R35.1
N$163: C38.1 R34.1
N$214: C41.1 U11.4
N$215: R40.2 U12.36
N$231: SJ5.1 U14.D4
N$232: R42.1 SJ5.2
N$233: SJ6.1 U14.D3
N$234: R41.1 SJ6.2
N$235: LED4.A R43.1
N$236: C50.2 Q4.3 R44.2 U17.18
N$237: C51.2 Q4.1 R44.1 U17.17
N$238: C52.2 U17.44
N$239: C55.1 R50.1
N$240: C54.1 R49.1
N$241: C53.1 R48.1
N$292: C56.1 U16.4
N$293: R54.2 U17.36
N$309: SJ7.1 U19.D4
N$310: R56.1 SJ7.2
N$311: SJ8.1 U19.D3
N$312: R55.1 SJ8.2
N$313: LED5.A R57.1
N$314: C65.2 Q5.3 R58.2 U22.18
N$315: C66.2 Q5.1 R58.1 U22.17
N$316: C67.2 U22.44
N$317: C70.1 R64.1
N$318: C69.1 R63.1
N$319: C68.1 R62.1
N$370: C71.1 U21.4
N$371: R68.2 U22.36
N$387: SJ9.1 U24.D4
N$388: R70.1 SJ9.2
N$389: SJ10.1 U24.D3
N$390: R69.1 SJ10.2
N$391: LED6.A R71.1
N$392: C80.2 Q6.3 R72.2 U27.18
N$393: C81.2 Q6.1 R72.1 U27.17
N$394: C82.2 U27.44
N$395: C85.1 R78.1
N$396: C84.1 R77.1
N$397: C83.1 R76.1
N$448: C86.1 U26.4
N$449: R82.2 U27.36
N$465: SJ11.1 U29.D4
N$466: R84.1 SJ11.2
N$467: SJ12.1 U29.D3
N$468: R83.1 SJ12.2
N$469: LED7.A R85.1
N$470: C95.2 Q7.3 R86.2 U32.18
N$471: C96.2 Q7.1 R86.1 U32.17
N$472: C97.2 U32.44
N$473: C100.1 R92.1
N$474: C99.1 R91.1
N$475: C98.1 R90.1
N$526: C101.1 U31.4
N$527: R96.2 U32.36
N$543: SJ13.1 U34.D4
N$544: R98.1 SJ13.2
N$545: SJ14.1 U34.D3
N$546: R97.1 SJ14.2
N$547: LED8.A R99.1
N$548: C110.2 Q8.3 R100.2 U37.18
N$549: C111.2 Q8.1 R100.1 U37.17
N$550: C112.2 U37.44
N$551: C115.1 R106.1
N$552: C114.1 R105.1
N$553: C113.1 R104.1
N$604: C116.1 U36.4
N$605: R110.2 U37.36
N$621: SJ15.1 U39.D4
N$622: R112.1 SJ15.2
N$623: SJ16.1 U39.D3
N$624: R111.1 SJ16.2
RESET: R5.2 R14.2 U3.3
RESET1: R19.2 R28.2 U7.3
RESET2: R33.2 R42.2 U12.3
RESET3: R47.2 R56.2 U17.3
RESET4: R61.2 R70.2 U22.3
RESET5: R75.2 R84.2 U27.3
RESET6: R89.2 R98.2 U32.3
RESET7: R103.2 R112.2 U37.3
RIGHT: JP3.2 R6.2 U3.39 U5.RING
RIGHT1: JP1.2 R20.2 U7.39 U10.RING
RIGHT2: JP2.2 R34.2 U12.39 U15.RING
RIGHT3: JP4.2 R48.2 U17.39 U20.RING
RIGHT4: JP5.2 R62.2 U22.39 U25.RING
RIGHT5: JP6.2 R76.2 U27.39 U30.RING
RIGHT6: JP7.2 R90.2 U32.39 U35.RING
RIGHT7: JP8.2 R104.2 U37.39 U40.RING
RX: R2.1 R13.2 U3.26
RX1: R17.1 R27.2 U7.26
RX2: R31.1 R41.2 U12.26
RX3: R45.1 R55.2 U17.26
RX4: R59.1 R69.2 U22.26
RX5: R73.1 R83.2 U27.26
RX6: R87.1 R97.2 U32.26
RX7: R101.1 R111.2 U37.26
VCC: R8.2 U1.1 U1.3 U2.5V
VCC1: R15.2 U6.1 U6.3 U9.5V
VCC2: R29.2 U11.1 U11.3 U14.5V
VCC3: R43.2 U16.1 U16.3 U19.5V
VCC4: R57.2 U21.1 U21.3 U24.5V
VCC5: R71.2 U26.1 U26.3 U29.5V
VCC6: R85.2 U31.1 U31.3 U34.5V
VCC7: R99.2 U36.1 U36.3 U39.5V

## Tracks (layer width: path | path; a pad name or v marks a point on that pad's centre or on a via)
1.8V  (via drill 0.51, 0.6)
  Top 0.254: C1.A 47.37,36.32 48.12,37.07 C2.1 48.12,38.75 47.94,38.92 U4.5 43.04,39.99 38.61,35.56 TP2.P$1 | 33.78,44.2 U3.31 33.78,40.89 33.53,40.64 C16.1 | 33.78,44.2 33.78,45.47 v33.53,45.72 | U3.24 33.73,44.24 33.78,44.2 | v34.8,48.26 34.28,48.78 U3.5 34.28,52.08 34.04,52.32 33.53,52.32 33.28,52.07 U3.7
  Bottom 0.254: v34.8,48.26 33.53,46.99 v33.53,45.72 33.53,40.51 33.02,40.01 33.02,36.07 TP2.P$1
  other vias: 33.53,35.56
1.8V1  (via drill 0.51, 0.6)
  Top 0.254: C18.A 101.22,36.32 101.97,37.07 C19.1 101.97,38.75 101.79,38.92 U8.5 96.89,39.99 92.46,35.56 TP4.P$1 | 87.63,44.2 U7.31 87.63,40.89 87.38,40.64 C30.1 | 87.63,44.2 87.63,45.47 v87.38,45.72 | U7.24 87.58,44.24 87.63,44.2 | v88.65,48.26 88.13,48.78 U7.5 88.13,52.08 87.88,52.32 87.38,52.32 87.13,52.07 U7.7
  Bottom 0.254: v88.65,48.26 87.38,46.99 v87.38,45.72 87.38,40.51 86.87,40.01 86.87,36.07 TP4.P$1
  other vias: 87.38,35.56
1.8V2  (via drill 0.51, 0.6)
  Top 0.254: C33.A 47.37,99.82 48.12,100.57 C34.1 48.12,102.25 47.94,102.42 U13.5 43.04,103.49 38.61,99.06 TP6.P$1 | 33.78,107.7 U12.31 33.78,104.39 33.53,104.14 C45.1 | 33.78,107.7 33.78,108.97 v33.53,109.22 | U12.24 33.73,107.74 33.78,107.7 | v34.8,111.76 34.28,112.28 U12.5 34.28,115.58 34.04,115.82 33.53,115.82 33.28,115.57 U12.7
  Bottom 0.254: v34.8,111.76 33.53,110.49 v33.53,109.22 33.53,104.01 33.02,103.5 33.02,99.57 TP6.P$1
  other vias: 33.53,99.06
1.8V3  (via drill 0.51, 0.6)
  Top 0.254: C48.A 101.22,99.82 101.97,100.57 C49.1 101.97,102.25 101.79,102.42 U18.5 96.89,103.49 92.46,99.06 TP8.P$1 | 87.63,107.7 U17.31 87.63,104.39 87.38,104.14 C60.1 | 87.63,107.7 87.63,108.97 v87.38,109.22 | U17.24 87.58,107.74 87.63,107.7 | v88.65,111.76 88.13,112.28 U17.5 88.13,115.58 87.88,115.82 87.38,115.82 87.13,115.57 U17.7
  Bottom 0.254: v88.65,111.76 87.38,110.49 v87.38,109.22 87.38,104.01 86.87,103.5 86.87,99.57 TP8.P$1
  other vias: 87.38,99.06
1.8V4  (via drill 0.51, 0.6)
  Top 0.254: C63.A 47.37,163.32 48.12,164.07 C64.1 48.12,165.75 47.94,165.93 U23.5 43.04,166.99 38.61,162.56 TP10.P$1 | 33.78,171.2 U22.31 33.78,167.89 33.53,167.64 C75.1 | 33.78,171.2 33.78,172.47 v33.53,172.72 | U22.24 33.73,171.24 33.78,171.2 | v34.8,175.26 34.28,175.78 U22.5 34.28,179.08 34.04,179.32 33.53,179.32 33.28,179.07 U22.7
  Bottom 0.254: v34.8,175.26 33.53,173.99 v33.53,172.72 33.53,167.51 33.02,167 33.02,163.07 TP10.P$1
  other vias: 33.53,162.56
1.8V5  (via drill 0.51, 0.6)
  Top 0.254: C78.A 101.22,163.32 101.97,164.07 C79.1 101.97,165.75 101.79,165.93 U28.5 96.89,166.99 92.46,162.56 TP12.P$1 | 87.63,171.2 U27.31 87.63,167.89 87.38,167.64 C90.1 | 87.63,171.2 87.63,172.47 v87.38,172.72 | U27.24 87.58,171.24 87.63,171.2 | v88.65,175.26 88.13,175.78 U27.5 88.13,179.08 87.88,179.32 87.38,179.32 87.13,179.07 U27.7
  Bottom 0.254: v88.65,175.26 87.38,173.99 v87.38,172.72 87.38,167.51 86.87,167 86.87,163.07 TP12.P$1
  other vias: 87.38,162.56
1.8V6  (via drill 0.51, 0.6)
  Top 0.254: C93.A 47.37,226.82 48.12,227.57 C94.1 48.12,229.25 47.94,229.43 U33.5 43.04,230.49 38.61,226.06 TP14.P$1 | 33.78,234.7 U32.31 33.78,231.39 33.53,231.14 C105.1 | 33.78,234.7 33.78,235.97 v33.53,236.22 | U32.24 33.73,234.74 33.78,234.7 | v34.8,238.76 34.28,239.28 U32.5 34.28,242.58 34.04,242.82 33.53,242.82 33.28,242.57 U32.7
  Bottom 0.254: v34.8,238.76 33.53,237.49 v33.53,236.22 33.53,231.01 33.02,230.5 33.02,226.57 TP14.P$1
  other vias: 33.53,226.06
1.8V7  (via drill 0.51, 0.6)
  Top 0.254: C108.A 101.22,226.82 101.97,227.57 C109.1 101.97,229.25 101.79,229.43 U38.5 96.89,230.49 92.46,226.06 TP16.P$1 | 87.63,234.7 U37.31 87.63,231.39 87.38,231.14 C120.1 | 87.63,234.7 87.63,235.97 v87.38,236.22 | U37.24 87.58,234.74 87.63,234.7 | v88.65,238.76 88.13,239.28 U37.5 88.13,242.58 87.88,242.82 87.38,242.82 87.13,242.57 U37.7
  Bottom 0.254: v88.65,238.76 87.38,237.49 v87.38,236.22 87.38,231.01 86.87,230.5 86.87,226.57 TP16.P$1
  other vias: 87.38,226.06
3.3V  (via drill 0.51)
  Top 0.254: C5.1 48.12,44.69 47.37,43.94 C6.A | C5.1 48.12,46.24 47.47,46.89 U1.5 47.47,46.96 | 33.27,47.24 32.51,47.24 32.01,46.74 U3.19 28.2,46.74 26.56,45.1 C13.1 | 33.27,47.24 34.8,47.24 | 34.8,47.24 36.2,47.24 | 36.2,47.24 U3.43 39.63,47.24 39.88,46.99 C15.1 | U3.45 36.56,48.24 36.2,47.88 36.2,47.24 | 33.27,47.24 33.24,47.28 33.24,49.24 | C14.1 27.42,48.88 27.78,49.24 U3.14 v32.26,49.24 33.24,49.24 | 34.71,44.74 U3.38 38.7,44.74 39.88,43.56 39.88,41.91 | U3.32 34.28,44.31 34.71,44.74 | 34.8,47.24 34.8,44.83 34.71,44.74 | 36.07,36.83 R10.1 | R2.2 32.26,38.1 33.53,36.83 36.07,36.83 | U3.6 33.78,49.78 33.24,49.24 | C6.A 43.69,43.18 42.42,41.91 39.88,41.91 | 36.07,36.83 38.61,36.83 39.88,38.1 39.88,41.91 | U4.1 50.28,39.99 50.42,40.13 50.42,41.02 50.15,41.29 U4.3 48.77,42.12 48.77,42.55 48.13,43.18 C6.A | C5.1 TP1.P$1 | R5.1 35.45,55.26 v36.07,55.88
  Bottom 0.254: v36.07,55.88 33.53,55.88 32.26,54.61 v32.26,49.24
  other vias: 46.23,45.72
3.3V1  (via drill 0.51)
  Top 0.254: C7.1 101.97,44.69 101.22,43.94 C17.A | C7.1 101.97,46.24 101.32,46.89 U6.5 101.32,46.96 | 87.12,47.24 86.36,47.24 85.86,46.74 U7.19 82.05,46.74 80.41,45.1 C27.1 | 87.12,47.24 88.65,47.24 | 88.65,47.24 90.04,47.24 | 90.04,47.24 U7.43 93.48,47.24 93.73,46.99 C29.1 | U7.45 90.4,48.24 90.04,47.88 90.04,47.24 | 87.12,47.24 87.09,47.28 87.09,49.24 | C28.1 81.27,48.88 81.62,49.24 U7.14 v86.11,49.24 87.09,49.24 | 88.56,44.74 U7.38 92.55,44.74 93.73,43.56 93.73,41.91 | U7.32 88.13,44.31 88.56,44.74 | 88.65,47.24 88.65,44.83 88.56,44.74 | 89.92,36.83 R23.1 | R17.2 86.11,38.1 87.38,36.83 89.92,36.83 | U7.6 87.63,49.78 87.09,49.24 | C17.A 97.54,43.18 96.27,41.91 93.73,41.91 | 89.92,36.83 92.46,36.83 93.73,38.1 93.73,41.91 | U8.1 104.12,39.99 104.27,40.13 104.27,41.02 104,41.29 U8.3 102.62,42.12 102.62,42.55 101.98,43.18 C17.A | C7.1 TP3.P$1 | R19.1 89.3,55.26 v89.92,55.88
  Bottom 0.254: v89.92,55.88 87.38,55.88 86.11,54.61 v86.11,49.24
  other vias: 100.08,45.72
3.3V2  (via drill 0.51)
  Top 0.254: C31.1 48.12,108.19 47.37,107.44 C32.A | C31.1 48.12,109.74 47.47,110.39 U11.5 47.47,110.46 | 33.27,110.74 32.51,110.74 32.01,110.24 U12.19 28.2,110.24 26.56,108.6 C42.1 | 33.27,110.74 34.8,110.74 | 34.8,110.74 36.2,110.74 | 36.2,110.74 U12.43 39.63,110.74 39.88,110.49 C44.1 | U12.45 36.56,111.74 36.2,111.38 36.2,110.74 | 33.27,110.74 33.24,110.78 33.24,112.74 | C43.1 27.42,112.38 27.78,112.74 U12.14 v32.26,112.74 33.24,112.74 | 34.71,108.24 U12.38 38.7,108.24 39.88,107.06 39.88,105.41 | U12.32 34.28,107.81 34.71,108.24 | 34.8,110.74 34.8,108.33 34.71,108.24 | 36.07,100.33 R37.1 | R31.2 32.26,101.6 33.53,100.33 36.07,100.33 | U12.6 33.78,113.28 33.24,112.74 | C32.A 43.69,106.68 42.42,105.41 39.88,105.41 | 36.07,100.33 38.61,100.33 39.88,101.6 39.88,105.41 | U13.1 50.28,103.49 50.42,103.63 50.42,104.52 50.15,104.79 U13.3 48.77,105.61 48.77,106.05 48.13,106.68 C32.A | C31.1 TP5.P$1 | R33.1 35.45,118.76 v36.07,119.38
  Bottom 0.254: v36.07,119.38 33.53,119.38 32.26,118.11 v32.26,112.74
  other vias: 46.23,109.22
3.3V3  (via drill 0.51)
  Top 0.254: C46.1 101.97,108.19 101.22,107.44 C47.A | C46.1 101.97,109.74 101.32,110.39 U16.5 101.32,110.46 | 87.12,110.74 86.36,110.74 85.86,110.24 U17.19 82.05,110.24 80.41,108.6 C57.1 | 87.12,110.74 88.65,110.74 | 88.65,110.74 90.04,110.74 | 90.04,110.74 U17.43 93.48,110.74 93.73,110.49 C59.1 | U17.45 90.4,111.74 90.04,111.38 90.04,110.74 | 87.12,110.74 87.09,110.78 87.09,112.74 | C58.1 81.27,112.38 81.62,112.74 U17.14 v86.11,112.74 87.09,112.74 | 88.56,108.24 U17.38 92.55,108.24 93.73,107.06 93.73,105.41 | U17.32 88.13,107.81 88.56,108.24 | 88.65,110.74 88.65,108.33 88.56,108.24 | 89.92,100.33 R51.1 | R45.2 86.11,101.6 87.38,100.33 89.92,100.33 | U17.6 87.63,113.28 87.09,112.74 | C47.A 97.54,106.68 96.27,105.41 93.73,105.41 | 89.92,100.33 92.46,100.33 93.73,101.6 93.73,105.41 | U18.1 104.12,103.49 104.27,103.63 104.27,104.52 104,104.79 U18.3 102.62,105.61 102.62,106.05 101.98,106.68 C47.A | C46.1 TP7.P$1 | R47.1 89.3,118.76 v89.92,119.38
  Bottom 0.254: v89.92,119.38 87.38,119.38 86.11,118.11 v86.11,112.74
  other vias: 100.08,109.22
3.3V4  (via drill 0.51)
  Top 0.254: C61.1 48.12,171.69 47.37,170.94 C62.A | C61.1 48.12,173.24 47.47,173.89 U21.5 47.47,173.96 | 33.27,174.24 32.51,174.24 32.01,173.74 U22.19 28.2,173.74 26.56,172.1 C72.1 | 33.27,174.24 34.8,174.24 | 34.8,174.24 36.2,174.24 | 36.2,174.24 U22.43 39.63,174.24 39.88,173.99 C74.1 | U22.45 36.56,175.24 36.2,174.88 36.2,174.24 | 33.27,174.24 33.24,174.28 33.24,176.24 | C73.1 27.42,175.88 27.78,176.24 U22.14 v32.26,176.24 33.24,176.24 | 34.71,171.74 U22.38 38.7,171.74 39.88,170.56 39.88,168.91 | U22.32 34.28,171.31 34.71,171.74 | 34.8,174.24 34.8,171.83 34.71,171.74 | 36.07,163.83 R65.1 | R59.2 32.26,165.1 33.53,163.83 36.07,163.83 | U22.6 33.78,176.78 33.24,176.24 | C62.A 43.69,170.18 42.42,168.91 39.88,168.91 | 36.07,163.83 38.61,163.83 39.88,165.1 39.88,168.91 | U23.1 50.28,166.99 50.42,167.13 50.42,168.02 50.15,168.29 U23.3 48.77,169.12 48.77,169.54 48.13,170.18 C62.A | C61.1 TP9.P$1 | R61.1 35.45,182.26 v36.07,182.88
  Bottom 0.254: v36.07,182.88 33.53,182.88 32.26,181.61 v32.26,176.24
  other vias: 46.23,172.72
3.3V5  (via drill 0.51)
  Top 0.254: C76.1 101.97,171.69 101.22,170.94 C77.A | C76.1 101.97,173.24 101.32,173.89 U26.5 101.32,173.96 | 87.12,174.24 86.36,174.24 85.86,173.74 U27.19 82.05,173.74 80.41,172.1 C87.1 | 87.12,174.24 88.65,174.24 | 88.65,174.24 90.04,174.24 | 90.04,174.24 U27.43 93.48,174.24 93.73,173.99 C89.1 | U27.45 90.4,175.24 90.04,174.88 90.04,174.24 | 87.12,174.24 87.09,174.28 87.09,176.24 | C88.1 81.27,175.88 81.62,176.24 U27.14 v86.11,176.24 87.09,176.24 | 88.56,171.74 U27.38 92.55,171.74 93.73,170.56 93.73,168.91 | U27.32 88.13,171.31 88.56,171.74 | 88.65,174.24 88.65,171.83 88.56,171.74 | 89.92,163.83 R79.1 | R73.2 86.11,165.1 87.38,163.83 89.92,163.83 | U27.6 87.63,176.78 87.09,176.24 | C77.A 97.54,170.18 96.27,168.91 93.73,168.91 | 89.92,163.83 92.46,163.83 93.73,165.1 93.73,168.91 | U28.1 104.12,166.99 104.27,167.13 104.27,168.02 104,168.29 U28.3 102.62,169.12 102.62,169.54 101.98,170.18 C77.A | C76.1 TP11.P$1 | R75.1 89.3,182.26 v89.92,182.88
  Bottom 0.254: v89.92,182.88 87.38,182.88 86.11,181.61 v86.11,176.24
  other vias: 100.08,172.72
3.3V6  (via drill 0.51)
  Top 0.254: C91.1 48.12,235.19 47.37,234.44 C92.A | C91.1 48.12,236.74 47.47,237.39 U31.5 47.47,237.46 | 33.27,237.74 32.51,237.74 32.01,237.24 U32.19 28.2,237.24 26.56,235.6 C102.1 | 33.27,237.74 34.8,237.74 | 34.8,237.74 36.2,237.74 | 36.2,237.74 U32.43 39.63,237.74 39.88,237.49 C104.1 | U32.45 36.56,238.74 36.2,238.38 36.2,237.74 | 33.27,237.74 33.24,237.78 33.24,239.74 | C103.1 27.42,239.38 27.78,239.74 U32.14 v32.26,239.74 33.24,239.74 | 34.71,235.24 U32.38 38.7,235.24 39.88,234.06 39.88,232.41 | U32.32 34.28,234.81 34.71,235.24 | 34.8,237.74 34.8,235.33 34.71,235.24 | 36.07,227.33 R93.1 | R87.2 32.26,228.6 33.53,227.33 36.07,227.33 | U32.6 33.78,240.28 33.24,239.74 | C92.A 43.69,233.68 42.42,232.41 39.88,232.41 | 36.07,227.33 38.61,227.33 39.88,228.6 39.88,232.41 | U33.1 50.28,230.49 50.42,230.63 50.42,231.52 50.15,231.79 U33.3 48.77,232.62 48.77,233.04 48.13,233.68 C92.A | C91.1 TP13.P$1 | R89.1 35.45,245.76 v36.07,246.38
  Bottom 0.254: v36.07,246.38 33.53,246.38 32.26,245.11 v32.26,239.74
  other vias: 46.23,236.22
3.3V7  (via drill 0.51)
  Top 0.254: C106.1 101.97,235.19 101.22,234.44 C107.A | C106.1 101.97,236.74 101.32,237.39 U36.5 101.32,237.46 | 87.12,237.74 86.36,237.74 85.86,237.24 U37.19 82.05,237.24 80.41,235.6 C117.1 | 87.12,237.74 88.65,237.74 | 88.65,237.74 90.04,237.74 | 90.04,237.74 U37.43 93.48,237.74 93.73,237.49 C119.1 | U37.45 90.4,238.74 90.04,238.38 90.04,237.74 | 87.12,237.74 87.09,237.78 87.09,239.74 | C118.1 81.27,239.38 81.62,239.74 U37.14 v86.11,239.74 87.09,239.74 | 88.56,235.24 U37.38 92.55,235.24 93.73,234.06 93.73,232.41 | U37.32 88.13,234.81 88.56,235.24 | 88.65,237.74 88.65,235.33 88.56,235.24 | 89.92,227.33 R107.1 | R101.2 86.11,228.6 87.38,227.33 89.92,227.33 | U37.6 87.63,240.28 87.09,239.74 | C107.A 97.54,233.68 96.27,232.41 93.73,232.41 | 89.92,227.33 92.46,227.33 93.73,228.6 93.73,232.41 | U38.1 104.12,230.49 104.27,230.63 104.27,231.52 104,231.79 U38.3 102.62,232.62 102.62,233.04 101.98,233.68 C107.A | C106.1 TP15.P$1 | R103.1 89.3,245.76 v89.92,246.38
  Bottom 0.254: v89.92,246.38 87.38,246.38 86.11,245.11 v86.11,239.74
  other vias: 100.08,236.22
ARST
  Top 0.254: S2.3 54.48,33.66 55.12,34.29 U2.RES
ARST1
  Top 0.254: S1.3 108.33,33.66 108.97,34.29 U9.RES
ARST2
  Top 0.254: S3.3 54.48,97.16 55.12,97.79 U14.RES
ARST3
  Top 0.254: S4.3 108.33,97.16 108.97,97.79 U19.RES
ARST4
  Top 0.254: S5.3 54.48,160.66 55.12,161.29 U24.RES
ARST5
  Top 0.254: S6.3 108.33,160.66 108.97,161.29 U29.RES
ARST6
  Top 0.254: S7.3 54.48,224.16 55.12,224.79 U34.RES
ARST7
  Top 0.254: S8.3 108.33,224.16 108.97,224.79 U39.RES
G1
  Top 0.254: U3.12 U3.11 U3.10 U3.9 32.28,53.94 R3.2
G2
  Top 0.254: U3.25 30.78,40.85 30.99,40.64 R4.2
G3
  Top 0.254: U7.12 U7.11 U7.10 U7.9 86.13,53.94 R18.2
G4
  Top 0.254: U7.25 84.63,40.85 84.84,40.64 R25.2
G5
  Top 0.254: U12.12 U12.11 U12.10 U12.9 32.28,117.44 R32.2
G6
  Top 0.254: U12.25 30.78,104.35 30.99,104.14 R39.2
G7
  Top 0.254: U17.12 U17.11 U17.10 U17.9 86.13,117.44 R46.2
G8
  Top 0.254: U17.25 84.63,104.35 84.84,104.14 R53.2
G9
  Top 0.254: U22.12 U22.11 U22.10 U22.9 32.28,180.94 R60.2
G10
  Top 0.254: U22.25 30.78,167.85 30.99,167.64 R67.2
G11
  Top 0.254: U27.12 U27.11 U27.10 U27.9 86.13,180.94 R74.2
G12
  Top 0.254: U27.25 84.63,167.85 84.84,167.64 R81.2
G13
  Top 0.254: U32.12 U32.11 U32.10 U32.9 32.28,244.44 R88.2
G14
  Top 0.254: U32.25 30.78,231.35 30.99,231.14 R95.2
G15
  Top 0.254: U37.12 U37.11 U37.10 U37.9 86.13,244.44 R102.2
G16
  Top 0.254: U37.25 84.63,231.35 84.84,231.14 R109.2
GBUF  (via drill 0.51)
  Top 0.254: R9.2 39.88,45.72 v39.24,46.35 38.86,46.74 U3.42 | U5.SLEEVE 41.19,12.66 JP3.1
  Bottom 0.254: v39.24,46.35 39.88,45.72 39.88,42.55 41.15,41.27 41.15,12.7 JP3.1
GBUF1  (via drill 0.51)
  Top 0.254: R22.2 93.73,45.72 v93.09,46.35 92.71,46.74 U7.42 | U10.SLEEVE 95.04,12.66 JP1.1
  Bottom 0.254: v93.09,46.35 93.73,45.72 93.73,42.55 95,41.27 95,12.7 JP1.1
GBUF2  (via drill 0.51)
  Top 0.254: R36.2 39.88,109.22 v39.24,109.86 38.86,110.24 U12.42 | U15.SLEEVE 41.19,76.16 JP2.1
  Bottom 0.254: v39.24,109.86 39.88,109.22 39.88,106.05 41.15,104.78 41.15,76.2 JP2.1
GBUF3  (via drill 0.51)
  Top 0.254: R50.2 93.73,109.22 v93.09,109.86 92.71,110.24 U17.42 | U20.SLEEVE 95.04,76.16 JP4.1
  Bottom 0.254: v93.09,109.86 93.73,109.22 93.73,106.05 95,104.78 95,76.2 JP4.1
GBUF4  (via drill 0.51)
  Top 0.254: R64.2 39.88,172.72 v39.24,173.35 38.86,173.74 U22.42 | U25.SLEEVE 41.19,139.66 JP5.1
  Bottom 0.254: v39.24,173.35 39.88,172.72 39.88,169.54 41.15,168.28 41.15,139.7 JP5.1
GBUF5  (via drill 0.51)
  Top 0.254: R78.2 93.73,172.72 v93.09,173.35 92.71,173.74 U27.42 | U30.SLEEVE 95.04,139.66 JP6.1
  Bottom 0.254: v93.09,173.35 93.73,172.72 93.73,169.54 95,168.28 95,139.7 JP6.1
GBUF6  (via drill 0.51)
  Top 0.254: R92.2 39.88,236.22 v39.24,236.85 38.86,237.24 U32.42 | U35.SLEEVE 41.19,203.16 JP7.1
  Bottom 0.254: v39.24,236.85 39.88,236.22 39.88,233.04 41.15,231.78 41.15,203.2 JP7.1
GBUF7  (via drill 0.51)
  Top 0.254: R106.2 93.73,236.22 v93.09,236.85 92.71,237.24 U37.42 | U40.SLEEVE 95.04,203.16 JP8.1
  Bottom 0.254: v93.09,236.85 93.73,236.22 93.73,233.04 95,231.78 95,203.2 JP8.1
GND  (via drill 0.51)
  Top 0.254: U3.4 34.78,50.31 35.85,49.24 U3.47 | v36.07,45.72 36.59,46.24 36.59,45.84 36.7,45.72 36.72,45.74 U3.40 | U3.35 35.78,43.65 36.07,43.94 | U3.16 30.97,48.24 v30.99,48.26 | v30.99,45.72 30.97,45.74 | 36.72,46.25 U3.41 | U3.21 30.21,45.74 | 30.21,45.74 30.23,45.72 | 28.39,46.25 30.21,46.25 30.21,45.74 | 28.39,45.23 30.21,45.23
  other vias: 37.34,43.18 46.23,41.27 34.16,37.67 37.34,50.8 43.69,47.62 29.72,50.8 51.31,45.72 51.31,38.1 51.31,50.8 44.96,20.32 29.72,43.18
  pour Top (isolate 0.305): 6.86,69.85 60.2,69.85 60.2,10.16 6.86,10.16
  pour Bottom (isolate 0.305): 6.86,10.16 6.86,69.85 60.2,69.85 60.2,10.16
GND1  (via drill 0.51)
  Top 0.254: U7.4 88.63,50.31 89.7,49.24 U7.47 | v89.92,45.72 90.44,46.24 90.44,45.84 90.55,45.72 90.57,45.74 U7.40 | U7.35 89.63,43.65 89.92,43.94 | U7.16 84.82,48.24 v84.84,48.26 | v84.84,45.72 84.82,45.74 | 90.57,46.25 U7.41 | U7.21 84.05,45.74 | 84.05,45.74 84.07,45.72 | 82.24,46.25 84.05,46.25 84.05,45.74 | 82.24,45.23 84.05,45.23
  other vias: 91.19,43.18 100.08,41.27 88.01,37.67 91.19,50.8 97.54,47.62 83.57,50.8 105.16,45.72 105.16,38.1 105.16,50.8 98.81,20.32 83.57,43.18
  pour Top (isolate 0.305): 60.71,69.85 114.05,69.85 114.05,10.16 60.71,10.16
  pour Bottom (isolate 0.305): 60.71,10.16 60.71,69.85 114.05,69.85 114.05,10.16
GND2  (via drill 0.51)
  Top 0.254: U12.4 34.78,113.81 35.85,112.74 U12.47 | v36.07,109.22 36.59,109.74 36.59,109.33 36.7,109.22 36.72,109.24 U12.40 | U12.35 35.78,107.15 36.07,107.44 | U12.16 30.97,111.74 v30.99,111.76 | v30.99,109.22 30.97,109.24 | 36.72,109.75 U12.41 | U12.21 30.21,109.24 | 30.21,109.24 30.23,109.22 | 28.39,109.75 30.21,109.75 30.21,109.24 | 28.39,108.73 30.21,108.73
  other vias: 37.34,106.68 46.23,104.78 34.16,101.17 37.34,114.3 43.69,111.12 29.72,114.3 51.31,109.22 51.31,101.6 51.31,114.3 44.96,83.82 29.72,106.68
  pour Top (isolate 0.305): 6.86,133.35 60.2,133.35 60.2,73.66 6.86,73.66
  pour Bottom (isolate 0.305): 6.86,73.66 6.86,133.35 60.2,133.35 60.2,73.66
GND3  (via drill 0.51)
  Top 0.254: U17.4 88.63,113.81 89.7,112.74 U17.47 | v89.92,109.22 90.44,109.74 90.44,109.33 90.55,109.22 90.57,109.24 U17.40 | U17.35 89.63,107.15 89.92,107.44 | U17.16 84.82,111.74 v84.84,111.76 | v84.84,109.22 84.82,109.24 | 90.57,109.75 U17.41 | U17.21 84.05,109.24 | 84.05,109.24 84.07,109.22 | 82.24,109.75 84.05,109.75 84.05,109.24 | 82.24,108.73 84.05,108.73
  other vias: 91.19,106.68 100.08,104.78 88.01,101.17 91.19,114.3 97.54,111.12 83.57,114.3 105.16,109.22 105.16,101.6 105.16,114.3 98.81,83.82 83.57,106.68
  pour Top (isolate 0.305): 60.71,133.35 114.05,133.35 114.05,73.66 60.71,73.66
  pour Bottom (isolate 0.305): 60.71,73.66 60.71,133.35 114.05,133.35 114.05,73.66
GND4  (via drill 0.51)
  Top 0.254: U22.4 34.78,177.31 35.85,176.24 U22.47 | v36.07,172.72 36.59,173.24 36.59,172.84 36.7,172.72 36.72,172.74 U22.40 | U22.35 35.78,170.65 36.07,170.94 | U22.16 30.97,175.24 v30.99,175.26 | v30.99,172.72 30.97,172.74 | 36.72,173.25 U22.41 | U22.21 30.21,172.74 | 30.21,172.74 30.23,172.72 | 28.39,173.25 30.21,173.25 30.21,172.74 | 28.39,172.23 30.21,172.23
  other vias: 37.34,170.18 46.23,168.28 34.16,164.67 37.34,177.8 43.69,174.62 29.72,177.8 51.31,172.72 51.31,165.1 51.31,177.8 44.96,147.32 29.72,170.18
  pour Top (isolate 0.305): 6.86,196.85 60.2,196.85 60.2,137.16 6.86,137.16
  pour Bottom (isolate 0.305): 6.86,137.16 6.86,196.85 60.2,196.85 60.2,137.16
GND5  (via drill 0.51)
  Top 0.254: U27.4 88.63,177.31 89.7,176.24 U27.47 | v89.92,172.72 90.44,173.24 90.44,172.84 90.55,172.72 90.57,172.74 U27.40 | U27.35 89.63,170.65 89.92,170.94 | U27.16 84.82,175.24 v84.84,175.26 | v84.84,172.72 84.82,172.74 | 90.57,173.25 U27.41 | U27.21 84.05,172.74 | 84.05,172.74 84.07,172.72 | 82.24,173.25 84.05,173.25 84.05,172.74 | 82.24,172.23 84.05,172.23
  other vias: 91.19,170.18 100.08,168.28 88.01,164.67 91.19,177.8 97.54,174.62 83.57,177.8 105.16,172.72 105.16,165.1 105.16,177.8 98.81,147.32 83.57,170.18
  pour Top (isolate 0.305): 60.71,196.85 114.05,196.85 114.05,137.16 60.71,137.16
  pour Bottom (isolate 0.305): 60.71,137.16 60.71,196.85 114.05,196.85 114.05,137.16
GND6  (via drill 0.51)
  Top 0.254: U32.4 34.78,240.81 35.85,239.74 U32.47 | v36.07,236.22 36.59,236.74 36.59,236.34 36.7,236.22 36.72,236.24 U32.40 | U32.35 35.78,234.15 36.07,234.44 | U32.16 30.97,238.74 v30.99,238.76 | v30.99,236.22 30.97,236.24 | 36.72,236.75 U32.41 | U32.21 30.21,236.24 | 30.21,236.24 30.23,236.22 | 28.39,236.75 30.21,236.75 30.21,236.24 | 28.39,235.73 30.21,235.73
  other vias: 37.34,233.68 46.23,231.78 34.16,228.17 37.34,241.3 43.69,238.12 29.72,241.3 51.31,236.22 51.31,228.6 51.31,241.3 44.96,210.82 29.72,233.68
  pour Top (isolate 0.305): 6.86,260.35 60.2,260.35 60.2,200.66 6.86,200.66
  pour Bottom (isolate 0.305): 6.86,200.66 6.86,260.35 60.2,260.35 60.2,200.66
GND7  (via drill 0.51)
  Top 0.254: U37.4 88.63,240.81 89.7,239.74 U37.47 | v89.92,236.22 90.44,236.74 90.44,236.34 90.55,236.22 90.57,236.24 U37.40 | U37.35 89.63,234.15 89.92,234.44 | U37.16 84.82,238.74 v84.84,238.76 | v84.84,236.22 84.82,236.24 | 90.57,236.75 U37.41 | U37.21 84.05,236.24 | 84.05,236.24 84.07,236.22 | 82.24,236.75 84.05,236.75 84.05,236.24 | 82.24,235.73 84.05,235.73
  other vias: 91.19,233.68 100.08,231.78 88.01,228.17 91.19,241.3 97.54,238.12 83.57,241.3 105.16,236.22 105.16,228.6 105.16,241.3 98.81,210.82 83.57,233.68
  pour Top (isolate 0.305): 60.71,260.35 114.05,260.35 114.05,200.66 60.71,200.66
  pour Bottom (isolate 0.305): 60.71,200.66 60.71,260.35 114.05,260.35 114.05,200.66
GPIO0
  Top 0.254: U3.33 34.78,40.04 R11.2
GPIO1
  Top 0.254: U3.34 35.28,41.43 36.07,40.64 R10.2
GPIO2
  Top 0.254: U7.33 88.63,40.04 R24.2
GPIO3
  Top 0.254: U7.34 89.13,41.43 89.92,40.64 R23.2
GPIO4
  Top 0.254: U12.33 34.78,103.54 R38.2
GPIO5
  Top 0.254: U12.34 35.28,104.93 36.07,104.14 R37.2
GPIO6
  Top 0.254: U17.33 88.63,103.54 R52.2
GPIO7
  Top 0.254: U17.34 89.13,104.93 89.92,104.14 R51.2
GPIO8
  Top 0.254: U22.33 34.78,167.04 R66.2
GPIO9
  Top 0.254: U22.34 35.28,168.43 36.07,167.64 R65.2
GPIO10
  Top 0.254: U27.33 88.63,167.04 R80.2
GPIO11
  Top 0.254: U27.34 89.13,168.43 89.92,167.64 R79.2
GPIO12
  Top 0.254: U32.33 34.78,230.54 R94.2
GPIO13
  Top 0.254: U32.34 35.28,231.93 36.07,231.14 R93.2
GPIO14
  Top 0.254: U37.33 88.63,230.54 R108.2
GPIO15
  Top 0.254: U37.34 89.13,231.93 89.92,231.14 R107.2
LEFT  (via drill 0.51)